# EAGLE board Third try-following diagram (EAGLE 9.6.2)
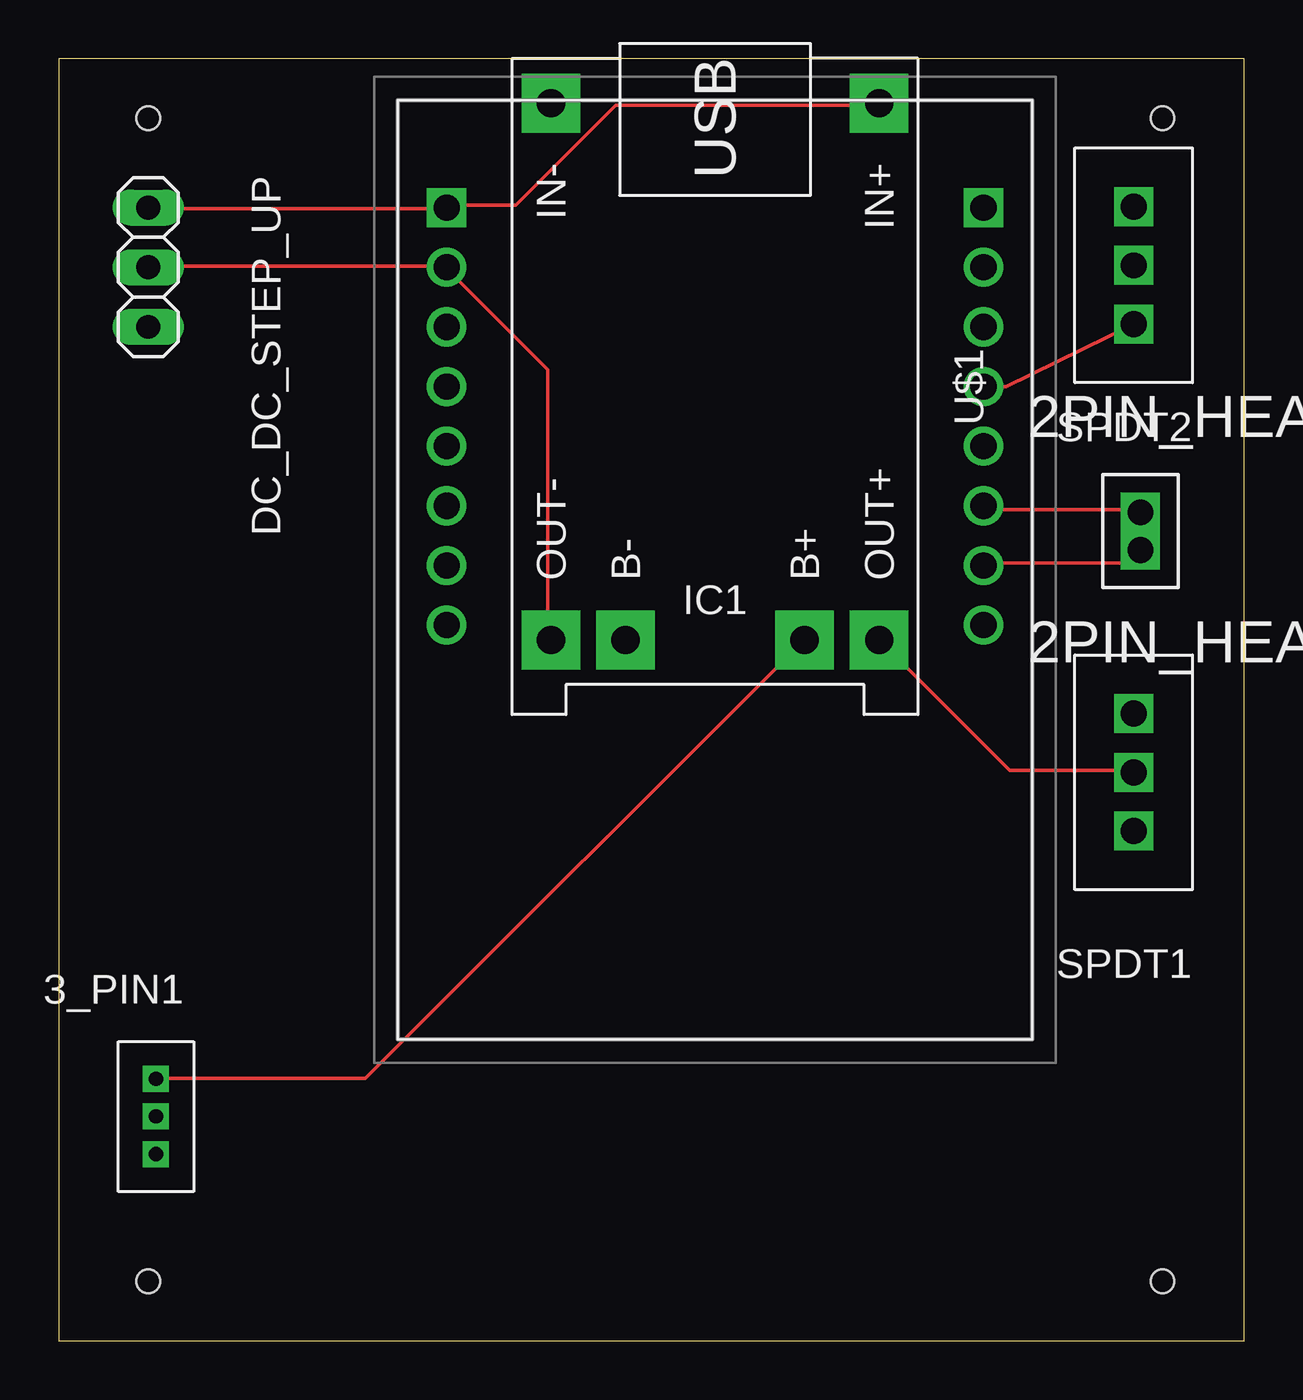
[diagram p0: board, top side]
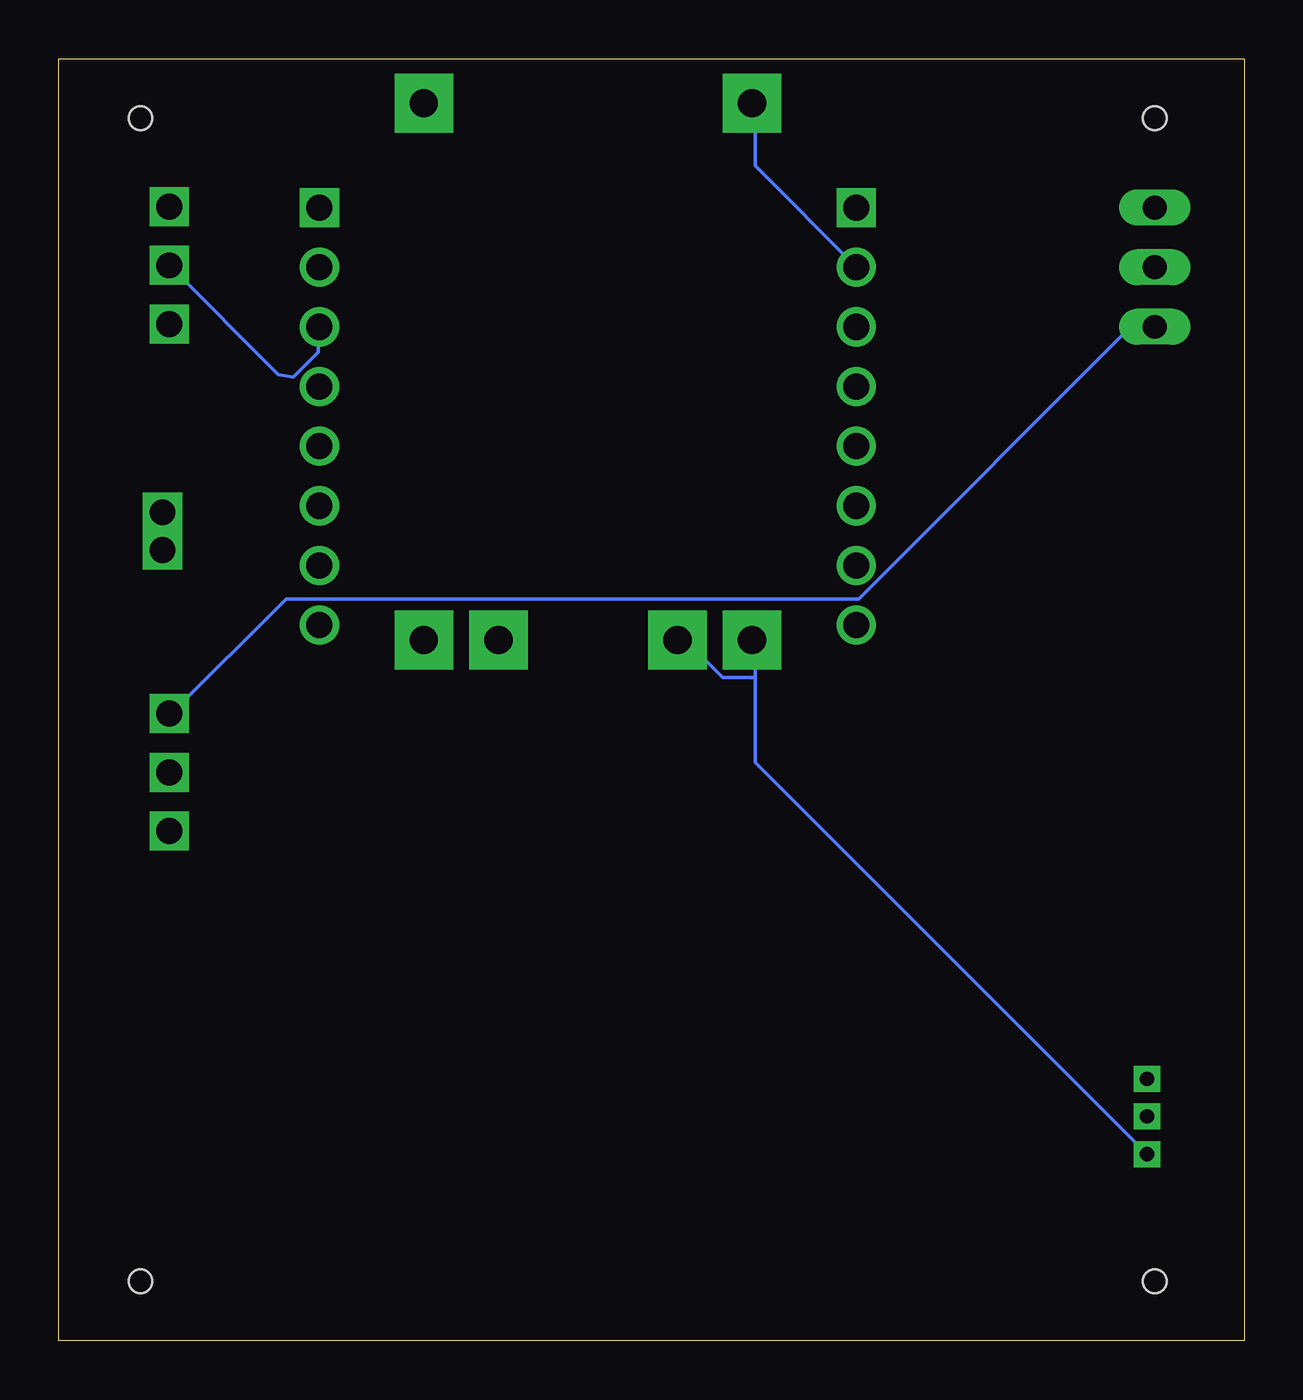
[diagram p1: board, bottom side, seen from below]

Size 50.47 x 54.6 mm. Coordinates in mm from the lower left corner, seen from the top.
Outline: 0,0 50.47,0 50.47,54.6 0,54.6 0,0
Copper layers (1*16): Top 0.035mm / dielectric 1.5mm / Bottom 0.035mm
Design rules "default": minimum track width 6mil, minimum drill 0.35mm, track to track 6mil, track to pad 6mil, pad to pad 6mil, via to via 6mil, smd to smd 6mil, copper to edge 40mil, drill to drill 6mil, minimum pad ring 10mil, minimum via ring 8mil, stop-mask expansion 4mil, vias tented up to drill 0mil, thermal gap 10mil
Holes 1 mm at 3.81,52.07 3.81,2.54 46.99,2.54 46.99,52.07

## Footprints (pad centres in the part's own frame; a part is rotated, then mirrored left to right if it is on the bottom)
2PIN_HEADER = drill 1.1 pad 1.665 square: U0R 1.6,4.8; U0T 1.6,3.2
3_PIN = drill 0.6 square: 3.7V 1.6,4.8; GND 1.6,1.6; T 1.6,3.2
1X03 = drill 1.016 long: 1 -2.54,0; 2 0,0; 3 2.54,0
ESP32CAM = drill 1.11 pad 1.665: 1 0,0; 2 0,2.54; 3 0,5.08; 4 0,7.62; 5 0,10.16; 6 0,12.7; 7 0,15.24; 10 22.86,15.24; 11 22.86,12.7; 12 22.86,10.16; 13 22.86,7.62; 14 22.86,5.08; 15 22.86,2.54; 16 22.86,0 | drill 1.11 pad 1.665 square: 8 0,17.78; 9 22.86,17.78
SPDT_SWITCH = drill 1.1 pad 1.665 square: P1 2.5,7.5; P2 2.5,2.5; PIN 2.5,5
BATTERY-CHARGER-LI-PROT = drill 1.2 pad 2.5 square: B+ 10.795,3.81; B- 10.795,-3.81; IN+ -12.065,6.985; IN- -12.065,-6.985; OUT+ 10.795,6.985; OUT- 10.795,-6.985

## Placement (x,y rotation side)
2PIN_HEADER1  2PIN_HEADER  [2PIN_HEADER]  44.45,30.48 0 top
3_PIN1  3_PIN  [3_PIN]  2.54,6.35 0 top
DC_DC_STEP_UP  [1X03]  3.81,45.72 270 top
IC1  ESP32-CAM  [ESP32CAM]  16.51,30.48 0 top
SPDT1  SPDT_SWITCH  [SPDT_SWITCH]  48.26,29.21 180 top
SPDT2  SPDT_SWITCH  [SPDT_SWITCH]  48.26,50.8 180 top
U$1  BATTERY-CHARGER-LI-PROT  [BATTERY-CHARGER-LI-PROT]  27.94,40.64 270 top

## Library data of the parts
2PIN_HEADER1 = 2pin_HEADER
3_PIN1 = 3_pin
DC_DC_STEP_UP = pinhead
IC1 = ESP32-CAM; DESCRIPTION: Modules PCBA Module RoHS; HEIGHT: 5mm; MANUFACTURER_NAME: Ai-Thinker; MANUFACTURER_PART_NUMBER: ESP32-CAM
SPDT1 SPDT2 = SPDT_SWITCH
U$1 = diy-modules

## Nets
N$2: 3_PIN1.3.7V U$1.B+
N$3: DC_DC_STEP_UP.2 IC1.7 U$1.IN- U$1.OUT-
N$4: DC_DC_STEP_UP.1 IC1.8 U$1.IN+
N$5: IC1.11 SPDT2.PIN
N$6: IC1.12 SPDT2.P1
N$8: 2PIN_HEADER1.U0R IC1.14
N$9: 2PIN_HEADER1.U0T IC1.15
N$10: 3_PIN1.GND U$1.B-
N$13: DC_DC_STEP_UP.3 SPDT1.P2
N$14: SPDT1.PIN U$1.OUT+

## Tracks (layer width: path | path; a pad name or v marks a point on that pad's centre or on a via)
N$2
  Top 0.152: 3_PIN1.3.7V 4.22,11.18 13.06,11.18 31.65,29.77 U$1.B+
N$3
  Top 0.152: DC_DC_STEP_UP.2 3.91,45.77 16.41,45.77 IC1.7 16.56,45.62 20.83,41.35 20.83,29.92 U$1.OUT-
  Bottom 0.152: IC1.7 20.83,50.04 20.83,52.63 U$1.IN-
N$4
  Top 0.152: DC_DC_STEP_UP.1 3.91,48.21 16.41,48.21 IC1.8 16.56,48.36 19.46,48.36 23.72,52.63 34.85,52.63 U$1.IN+
N$5
  Bottom 0.152: IC1.11 39.42,43.18 39.42,42.11 40.49,41.05 41.12,41.16 SPDT2.PIN
N$6
  Top 0.152: SPDT2.P1 40.33,40.64 IC1.12
N$8
  Top 0.152: 2PIN_HEADER1.U0R 46.18,35.41 39.57,35.41 39.42,35.56 IC1.14
N$9
  Top 0.152: IC1.15 39.42,33.12 46.05,33.12 2PIN_HEADER1.U0T
N$10
  Bottom 0.152: 3_PIN1.GND 20.83,24.64 20.83,28.25 | 20.83,29.77 20.83,28.25 | 20.83,28.25 22.2,28.25 23.72,29.77 24.03,29.77 U$1.B-
N$13
  Bottom 0.152: DC_DC_STEP_UP.3 4.83,43.18 16.41,31.6 40.79,31.6 45.67,26.72 SPDT1.P2
N$14
  Top 0.152: SPDT1.PIN 45.67,24.28 40.49,24.28 U$1.OUT+